# Altium PCB betterfc_v0.1.PcbDoc
Units mm, origin at the board's own origin, x right, y up, seen from the top; angles counter-clockwise.
Board outline 30.17 x 30.17 mm, 4 copper layers (Top Layer, Layer 1, Layer 2, Bottom Layer), stack 0.603 mm thick; 57 components, 53 nets, 226 pads, 81 vias.
Unrouted connection lines stored in the file: 1.
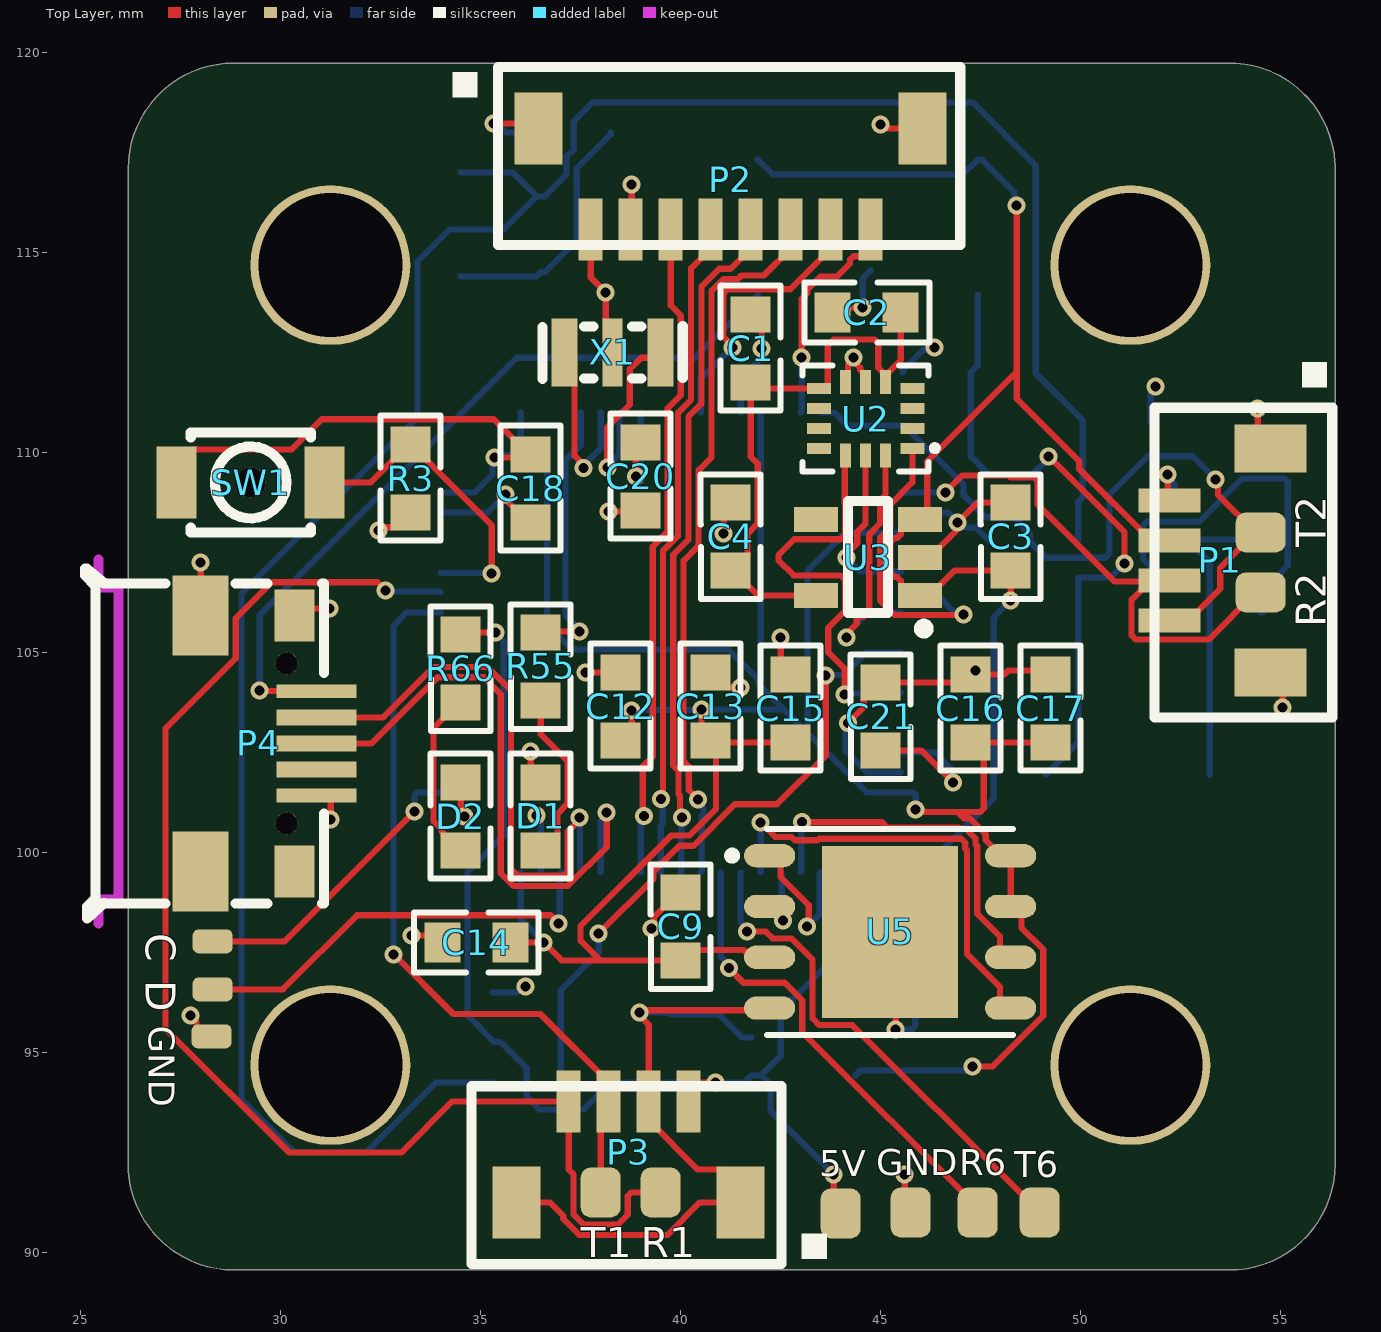
[diagram p0: Top Layer view]
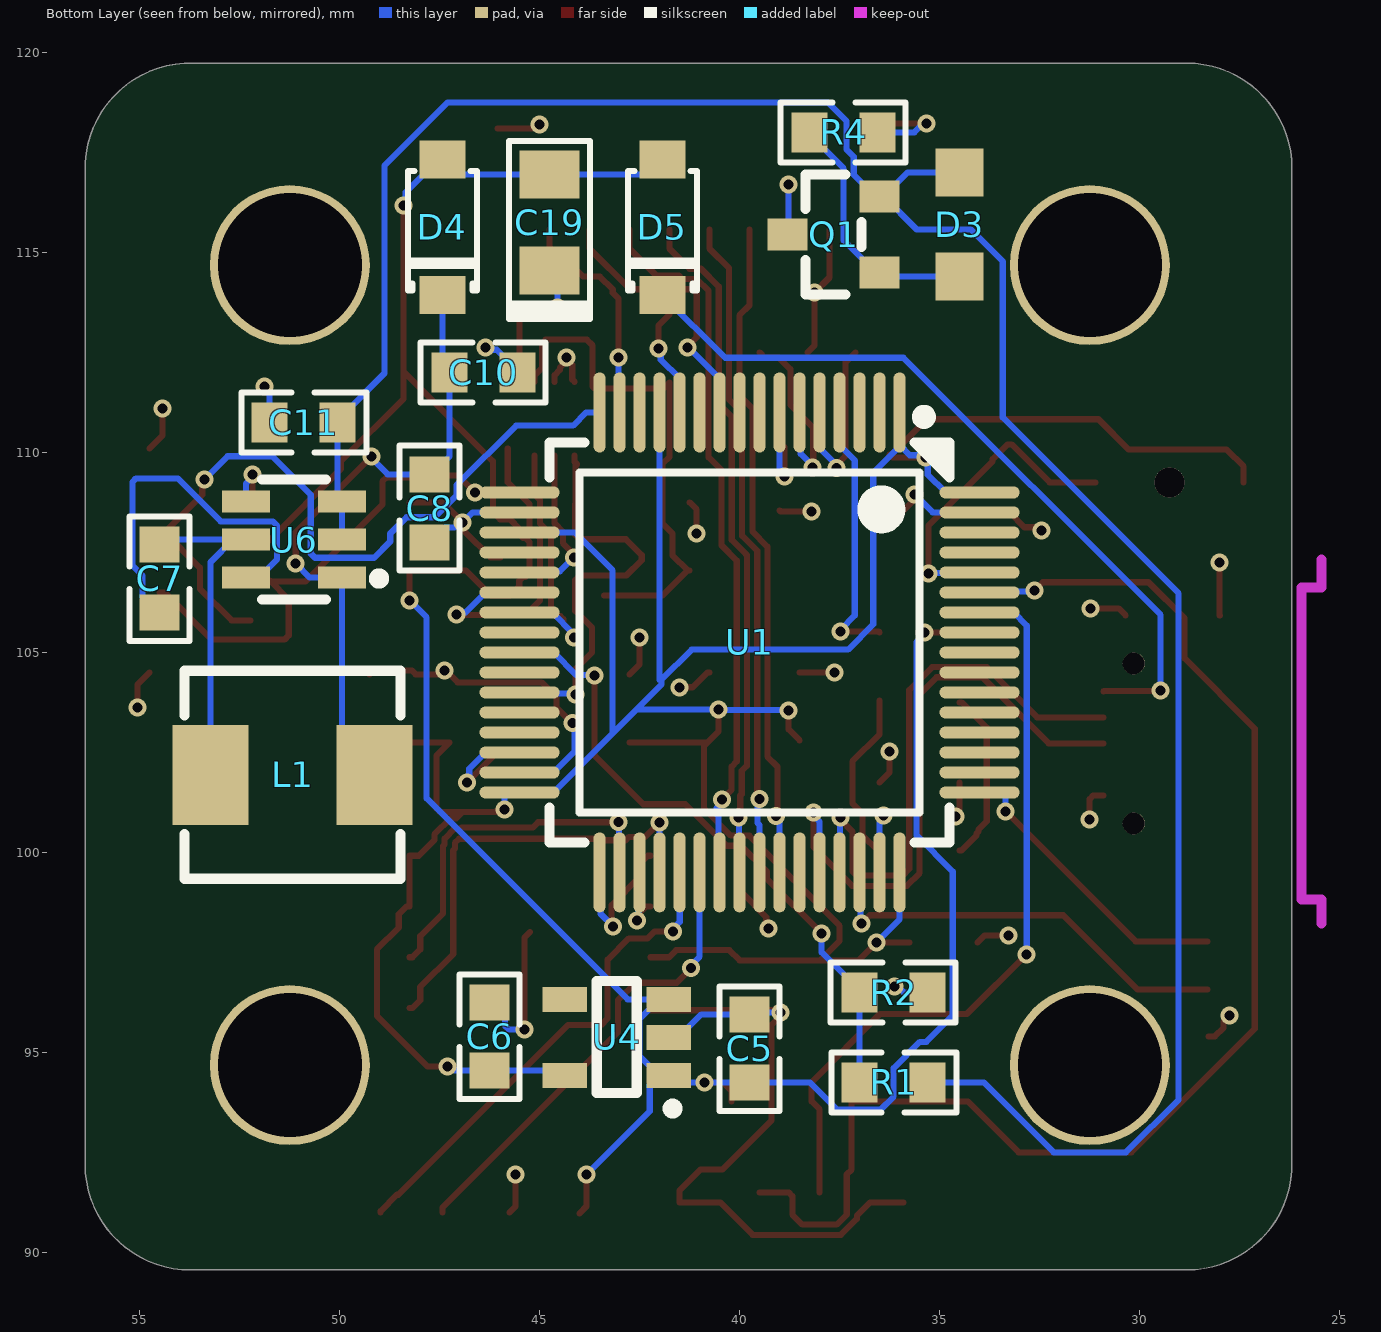
[diagram p1: Bottom Layer view, seen from below]
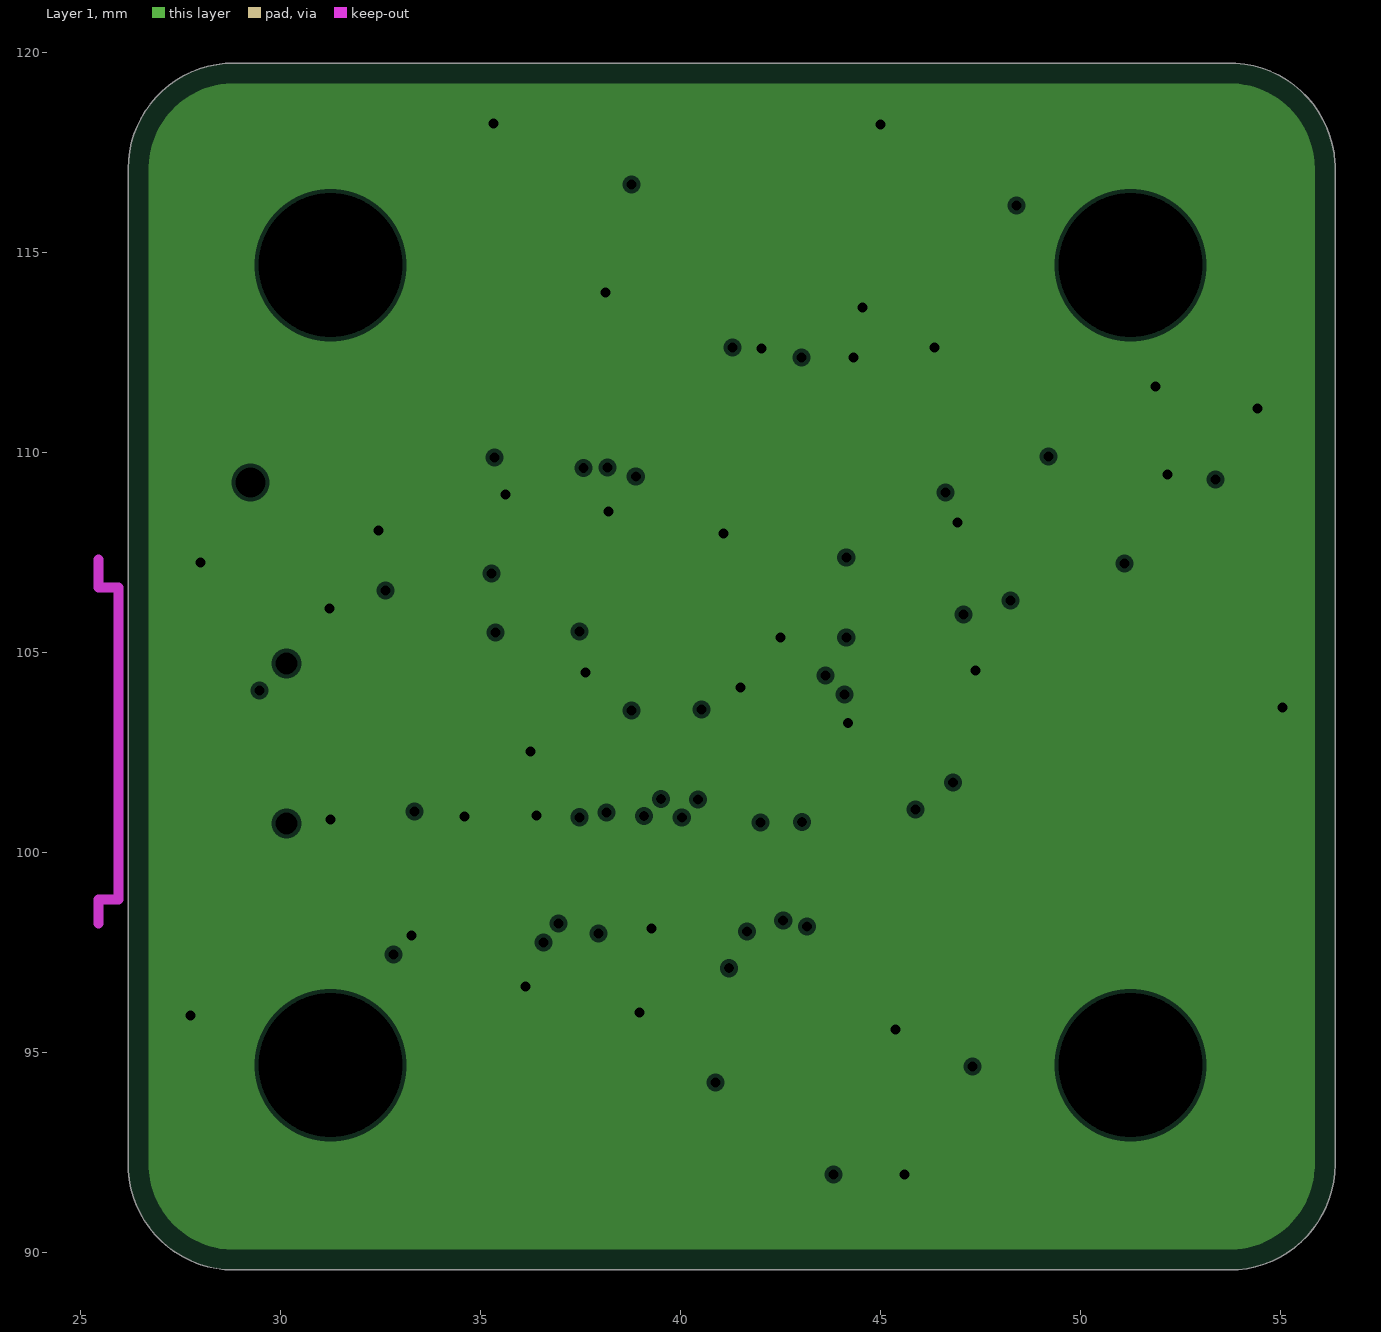
[diagram p2: Layer 1, clearances drawn from the general rule]
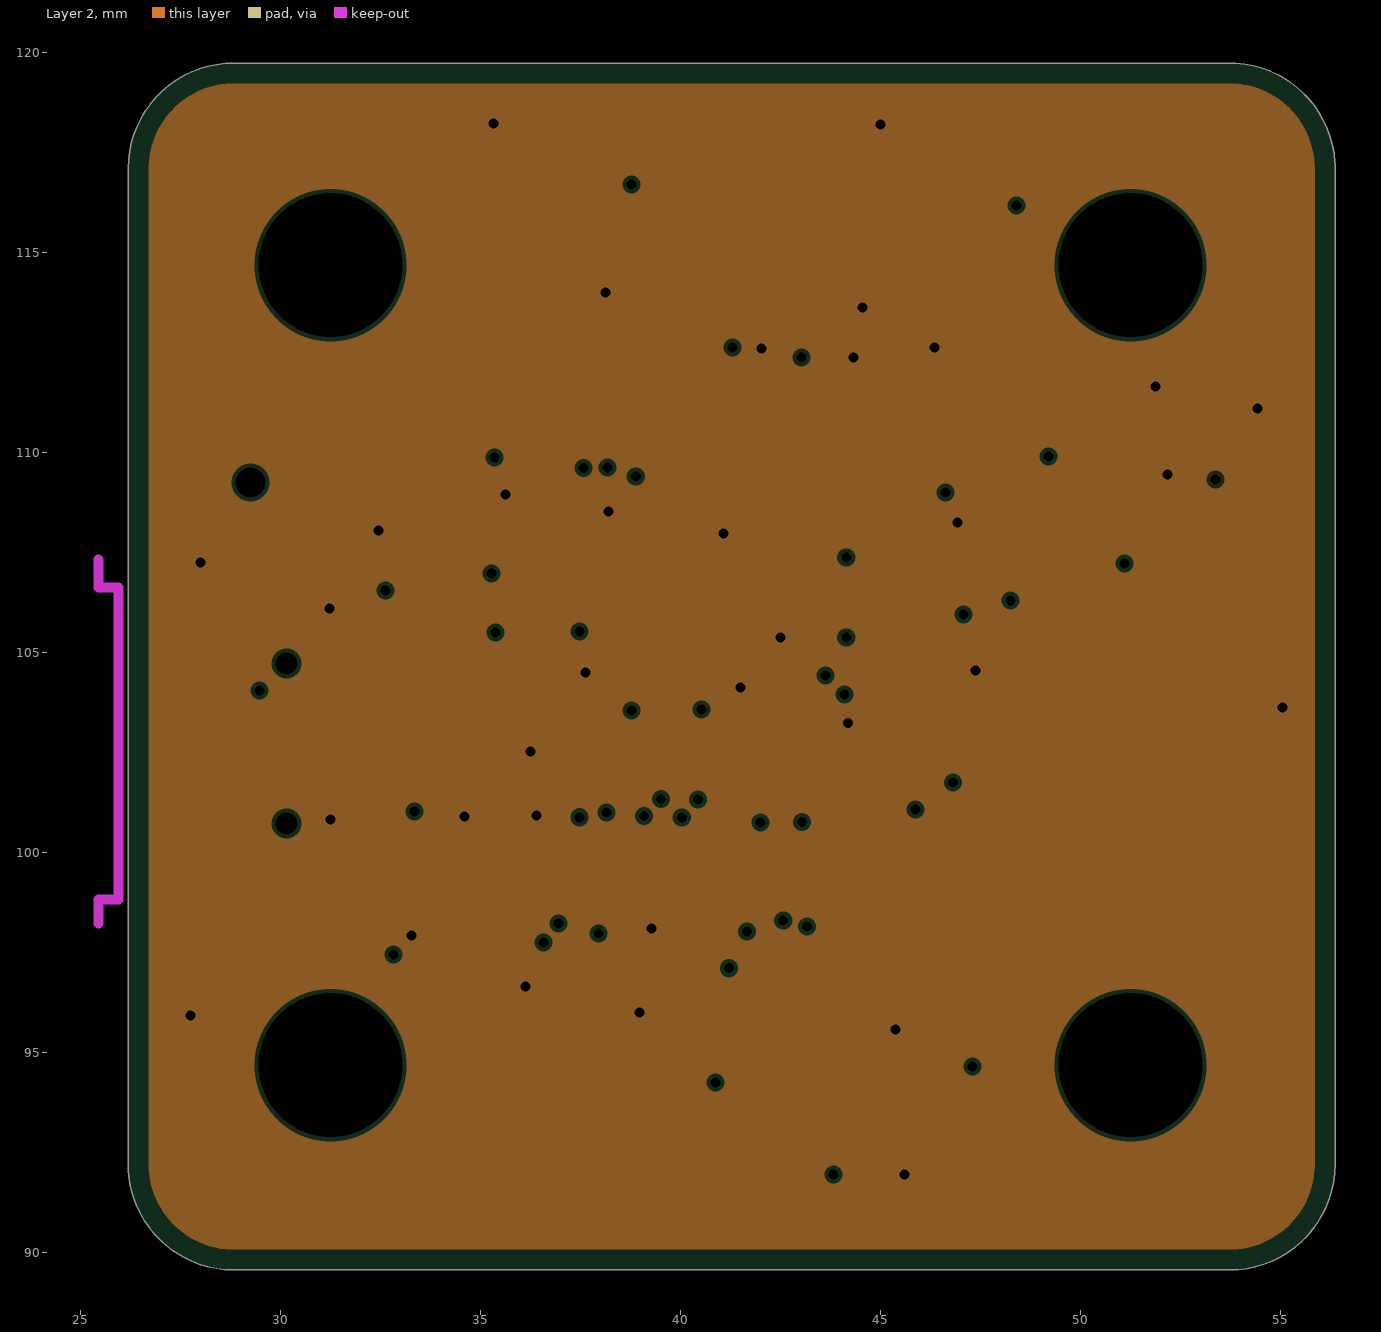
[diagram p3: Layer 2, clearances drawn from the general rule]

## Layer stack, top to bottom
Top Solder: solder mask 0.0102, Solder Resist, Dk 3.5
Top Layer: signal copper 0.0356
Dielectric 2: prepreg 0.0711, PP-006, Dk 4.1
Layer 1: plane copper 0.035, net GND
Dielectric 1: dielectric 0.32, FR-4, Dk 4.8
Layer 2: plane copper 0.035, net GND
Dielectric 3: prepreg 0.0711, PP-006, Dk 4.1
Bottom Layer: signal copper 0.0356
Bottom Solder: solder mask 0.0102, Solder Resist, Dk 3.5

## Board outline
28.829,89.562 cw(c28.829,92.202) 26.193,92.045 26.189,92.075 26.189,117.094 cw(c28.829,117.094) 28.829,119.734 28.83,119.734 53.721,119.734 53.848,119.734 53.878,119.73 cw(c53.721,117.094) 56.357,117.251 56.361,117.221 56.361,92.202 cw(c53.721,92.202) 53.721,89.562

## Design rules (kind name [scope] priority, off if disabled: settings)
BoardOutlineClearance [All] p1: gap=0.2 ignorepadtopadclearanceinfootprint=FALSE
Clearance [All] p1: gap=0.102 ignorepadtopadclearanceinfootprint=FALSE except(0.127: Arc-Via Track-Via SMDPad-Via THPad-Via Via-Via Via-Fill Via-Poly Via-Region Via-Text; 0.25: Arc-Hole Track-Hole SMDPad-Hole THPad-Hole Via-Hole Fill-Hole Poly-Hole Region-Hole Text-Hole)
ComponentClearance [All] p1: gap=0.102 collisioncheckmode=3 verticalgap=0.102 showdistances=TRUE
DiffPairsRouting [All] p1: maxlimit=0.102 minlimit=0.102 mostfreqgap=0.102 toplayer_minwidth=0.102 toplayer_maxwidth=1816.048 toplayer_prefwidth=0.102 bottomlayer_minwidth=0.102 bottomlayer_maxwidth=1816.048 bottomlayer_prefwidth=0.102 maxuncoupledlength=12.7
Height [All] p1: minheight=0 maxheight=1816.048 prefheight=12.7
HoleSize [All] p1: absolutevalues=TRUE maxlimit=6.3 minlimit=0.2 maxpercent=80.000 minpercent=20.000
HoleToHoleClearance [All] p1: gap=0.25 allowstackedmicrovias=FALSE
MinimumAnnularRing [All] p1: minimumring=0.076
MinimumSolderMaskSliver [All] p1: minsoldermaskwidth=0
PlaneClearance [All] p1: clearance=0.102
PlaneConnect PlaneConnectPowerPads [InPadClass('PowerPads')] p1: planeconnectstyle=Direct reliefexpansion=0.508 reliefentries=4 reliefconductorwidth=0.254 reliefairgap=0.254
PlaneConnect [All] p2: pad.planeconnectstyle=Relief pad.reliefexpansion=0.3 pad.reliefentries=4 pad.reliefconductorwidth=0.102 pad.reliefairgap=0.102 via.planeconnectstyle=Direct via.reliefexpansion=0.3 via.reliefentries=4 via.reliefconductorwidth=0.127 via.reliefairgap=0.127
PolygonConnect PolygonConnectPowerPads [All vs (InPadClass('PowerPads'))] p1: connectstyle=Direct reliefconductorwidth=0.254 reliefentries=4 polygonreliefangle="90 Angle" airgapwidth=0.254
PolygonConnect [All] p2: thpad.connectstyle=Relief thpad.reliefconductorwidth=0.102 thpad.reliefentries=4 thpad.polygonreliefangle="90 Angle" thpad.airgapwidth=0.102 smdpad.connectstyle=Relief smdpad.reliefconductorwidth=0.102 smdpad.reliefentries=4 smdpad.polygonreliefangle="90 Angle" smdpad.airgapwidth=0.102 via.connectstyle=Direct via.reliefconductorwidth=0.127 via.reliefentries=4 via.polygonreliefangle="90 Angle" via.airgapwidth=0.127
RoutingVias [All] p1: holewidth=0.2 width=0.45 viastyle="Through Hole" minholewidth=0.2 minwidth=0.45 maxholewidth=6.3 maxwidth=6.55
SilkToSilkClearance [All] p1: silktosilkclearance=0
SilkToSolderMaskClearance [IsPad] p1: minsilkscreentomaskgap=0.102 clearancetoexposedcopper=TRUE
SolderMaskExpansion [All] p1: expansion=0.075 istentingtop=FALSE
Width [All] p1: maxlimit=1816.048 minlimit=0.155 preferedwidth=0.155 minimp=50.000000 maximp=50.000000 favimp=50.000000
20 further rules are at their usual default settings.

## Classes and differential pairs
component class betterfc: 5V C C1 C2 C3 C4 C5 C6 C7 C8 C9 C10 C11 C12 C13 C14 C15 C16 C17 C18 C19 C20 C21 D D1 D2 D3 D4 D5 GND L1 P1 P2 P3 Q1 R1 R2 R3 R4 R6 R55 R66 SW1 T1 T2 T6 U1 U2 U3 U4 U5 U6 X1

## Components (designator, comment, footprint, x,y, rotation, side; value= is the part's Value field where it differs from the comment)
5V "PAD" pad#1 44,90.975 r0 top
C "PAD" pad#2 28.3,97.775 r90 top (schematic designator SWC)
C1 "100nF" 0603 48.798,118.595 r90 top
C2 "100nF" 0603 50.645,106.452 r0 top
C3 "1uF (X7R)" 0603 41.202,101.905 r270 top
C4 "1uF (X7R)" 0603 34.202,101.905 r270 top
C5 "1uF (X7R)" 0603 46.798,89.105 r270 bottom
C6 "1uF (X7R)" 0603 53.298,89.405 r270 bottom
C7 "100nF" 0603 61.548,100.855 r270 bottom
C8 "22uF" 0603 40.702,114.595 r90 bottom
C9 "100nF" 0603 32.952,92.155 r270 top
C10 "22uF" 0603 52.395,119.048 r0 bottom
C11 "10uF" 0603 44.905,103.702 r180 bottom
C12 "100nF" 0603 45.548,109.645 r90 top
C13 "100nF" 0603 47.798,109.645 r90 top
C14 "100nF" 0603 28.905,104.798 r180 top
C15 "100nF" 0603 49.798,109.595 r90 top
C16 "100nF" 0603 54.298,109.595 r90 top
C17 "4.7uF" 0603 56.298,109.595 r90 top
C18 "100nF" 0603 43.298,115.095 r90 top
C19 "100uF" "polorizedC - duplicate" 44.75,115.75 r90 bottom
C20 "1uF" 0603 46.048,115.395 r90 top
C21 "2.2uF" 0603 37.952,97.405 r270 top
D "PAD" pad#2 28.3,96.575 r90 top (schematic designator SWD)
D1 "LED1 (Blue - Status)" 0603 43.548,106.895 r90 top
D2 "LED2 (Red - PWR)" 0603 41.548,106.895 r90 top
D3 "Zenerdiode" Zenerdiode 34.5,117 r90 bottom
D4 "B5819W_C305445" scottydiode 47.5,116 r90 bottom
D5 "B5819W_C305445" scottydiode 42,116 r90 bottom
GND "PAD" pad#1 45.75,91 r180 top (schematic designator GND3)
GND "PAD" pad#2 28.275,95.4 r270 top (schematic designator GND2)
L1 "4.7uH" coil 51,101.5 r180 bottom
P1 "RXplug" RXplug 51.336,94.862 r270 top
P2 "ESCplug" ESCplug 40.767,115.57 r0 top
P3 "VTXplug" VTXplug 33.501,90.346 r180 top
P4 "MicroUSB" microUSB 31.493,106.941 r180 top
Q1 "mosfet" mosfet 37.395,115.474 r180 bottom
R1 "10k" 0603 30.155,87.202 r180 bottom
R1 "PAD" pad#1 39.5,91.5 r180 top
R2 "1k" 0603 42.145,103.548 r0 bottom
R2 "PAD" pad#1 54.5,106.5 r90 top
R3 "10k" 0603 40.298,115.345 r90 top
R4 "100k" 0603 43.395,125.048 r0 bottom
R6 "PAD" pad#1 47.425,91 r180 top
R55 "150" 0603 29.452,98.655 r270 top
R66 "150" 0603 27.452,98.605 r270 top
SW1 "button" button 32.996,109.016 r0 top
T1 "PAD" pad#1 38,91.5 r0 top
T2 "PAD" pad#1 54.5,108 r90 top
T6 "PAD" pad#1 48.975,91 r180 top
U1 "stm32f722" STM32F722RET6 39.35,105.142 r0 bottom
U2 "BMI270" bmi270 44.25,110.75 r0 top
U3 "AP2112K-3.3TRG1" LDO 44.5,107.25 r0 top
U4 "AP2112K-3.3TRG1" LDO 43.25,95.25 r180 bottom
U5 "blackbox" blackbox 45.25,98 r270 top
U6 "AP63205WU-7" AP63205WU-7 51,107.75 r90 bottom
X1 "8Mhz" crystal 38.325,111.015 r0 top

## Footprints (in the part's own frame and the unit in brackets; to place one, negate y for a bottom-side part, rotate by r counter-clockwise, add the part's x,y. Pads: shape width x height; smd on the part's side, far side on the other; paste and mask are expansions set on the pad)
0603 [mm]
  rect 0.9x1 smd paste+0 mask+0.051: 1(-6.845,7.048) 2(-5.145,7.048)
  silkscreen extent -7.54,6.3 -4.43,7.8
AP63205WU-7 [mm]
  rect 0.55x1.2 smd paste+0 mask+0.051: 1(-0.877,-1.061) 2(0.073,-1.061) 3(1.022,-1.061) 4(1.022,1.339) 5(0.073,1.339) 6(-0.877,1.339)
  silkscreen extent -1.43,-2.11 1.57,0.94
blackbox [mm]
  oval 0.581x1.276 smd paste+0 mask+0.051: 1(-1.92,-3.026) 2(-0.65,-3.026) 3(0.62,-3.026) 4(1.89,-3.026) 5(1.89,2.999) 6(0.62,2.999) 7(-0.65,2.999) 8(-1.92,2.999)
  rect 4.3x3.4 smd paste+0 mask+0.051: 9(-0.015,-0.013)
  silkscreen extent -2.59,-4.06 2.56,3.06
bmi270 [mm]
  rect 0.6x0.27 smd paste+0 mask+0.051: 1(1.543,-0.654) 2(1.543,-0.154) 3(1.543,0.346) 4(1.543,0.846) 8(-0.797,0.846) 9(-0.797,0.346) 10(-0.797,-0.154) 11(-0.797,-0.654)
  rect 0.27x0.6 smd paste+0 mask+0.051: 5(0.873,1.016) 6(0.373,1.016) 7(-0.127,1.016) 12(-0.127,-0.824) 13(0.373,-0.824) 14(0.873,-0.824)
  silkscreen extent -1.2,-1.23 2.18,1.42
button [mm]
  rect 1x1.8 smd paste+0 mask+0.051: 1(-5.596,0.234) 2(-1.896,0.234)
  round 0.75 hole 0.75 unplated paste+0: ""(-3.746,0.234)
  silkscreen extent -5.25,-1.02 -2.25,1.48
coil [mm]
  rect 1.9x2.5 smd paste+0 mask+0.051: 1(-2.225,0.441) 2(1.875,0.441)
  silkscreen extent -2.87,-2.16 2.53,3.04
crystal [mm]
  rect 0.65x1.7 smd paste+0 mask+0.051: 1(-1.225,1.485) 3(1.175,1.485)
  rect 0.5x1.7 smd paste+0 mask+0.051: 2(-0.025,1.485)
  silkscreen extent -1.78,0.82 1.73,2.15
ESCplug [mm]
  rect 0.6x1.55 smd: 1(-3.016,0) 2(-2.016,0) 3(-1.016,0) 4(-0.016,0) 5(0.984,0) 6(1.984,0) 7(2.984,0) 8(3.984,0)
  rect 1.2x1.8 smd: 9(-4.316,2.525) 10(5.284,2.525)
  silkscreen extent -6.48,-0.38 6.22,4.06
LDO [mil]
  rect 43.5x24.5 smd paste+0 mask+2: 1(58.25,-32.48) 2(58.25,4.89) 3(58.25,42.3) 4(-44.11,42.3) 5(-44.11,-32.48)
  silkscreen extent -13,-70 67,60
microUSB [mm]
  rect 2x0.34 smd paste+0 mask+0.051: 1(0.592,2.916) 5(0.592,5.516)
  rect 2x0.4 smd paste+0 mask+0.051: 2(0.592,3.566) 3(0.592,4.216) 4(0.592,4.866)
  rect 1x1.3 smd paste+0 mask+0.051: 6(1.143,1.016) 9(1.143,7.416)
  rect 1.4x2 smd paste+0 mask+0.051: 7(3.497,1.016) 8(3.497,7.416)
  round 0.55 hole 0.55 unplated paste+0: ""(1.347,6.216) ""(1.347,2.216)
  Keep-Out Layer lines w0.254: 6.045,8.716 6.045,8.116 5.545,8.116 5.545,8.016 5.545,0.316 6.045,0.316 6.045,-0.384
  silkscreen extent 0.41,-0.15 6.38,8.59
mosfet [mm]
  rect 1x0.8 smd paste+0 mask+0.051: 1(0.895,-0.974) 2(0.895,0.926) 3(-1.405,-0.024)
  silkscreen extent -0.96,-1.52 0.44,1.48
pad#1 [mm]
  rrect50% 1x1.25 smd: 1(0,0)
pad#2 [mm]
  rrect50% 0.6x1 smd: 1(0,0)
"polorizedC - duplicate" [mm]
  rect 1.2x1.5 smd paste+0 mask+0.051: 1(-1.2,0) 2(1.2,0)
  silkscreen extent -2.41,-1.02 2.03,1.02
RXplug [mm]
  rect 0.6x1.55 smd: 1(-13.938,0.889) 2(-12.938,0.889) 3(-11.938,0.889) 4(-10.938,0.889)
  rect 1.2x1.8 smd: 5(-15.238,3.414) 6(-9.638,3.414)
  silkscreen extent -17.4,0.51 -8.51,4.95
scottydiode [mm]
  rect 0.95x1.15 smd paste+0 mask+0.051: 1(-2.065,-0.074) 2(1.32,-0.074)
  silkscreen extent -1.95,-0.94 1.03,0.79
STM32F722RET6 [mm]
  oval 0.3x2 smd paste+0 mask+0.051: 1(-3.35,-5.858) 2(-2.85,-5.858) 3(-2.35,-5.858) 4(-1.85,-5.858) 5(-1.35,-5.858) 6(-0.85,-5.858) 7(-0.35,-5.858) 8(0.15,-5.858) 9(0.65,-5.858) 10(1.15,-5.858) 11(1.65,-5.858) 12(2.15,-5.858) 13(2.65,-5.858) 14(3.15,-5.858) 15(3.65,-5.858) 16(4.15,-5.858) 33(4.15,5.642) 34(3.65,5.642) 35(3.15,5.642) 36(2.65,5.642) 37(2.15,5.642) 38(1.65,5.642) 39(1.15,5.642) 40(0.65,5.642) 41(0.15,5.642) 42(-0.35,5.642) 43(-0.85,5.642) 44(-1.35,5.642) 45(-1.85,5.642) 46(-2.35,5.642) 47(-2.85,5.642) 48(-3.35,5.642)
  oval 2x0.3 smd paste+0 mask+0.051: 17(6.15,-3.858) 18(6.15,-3.358) 19(6.15,-2.858) 20(6.15,-2.358) 21(6.15,-1.858) 22(6.15,-1.358) 23(6.15,-0.858) 24(6.15,-0.358) 25(6.15,0.142) 26(6.15,0.642) 27(6.15,1.142) 28(6.15,1.642) 29(6.15,2.142) 30(6.15,2.642) 31(6.15,3.142) 32(6.15,3.642) 49(-5.35,3.642) 50(-5.35,3.142) 51(-5.35,2.642) 52(-5.35,2.142) 53(-5.35,1.642) 54(-5.35,1.142) 55(-5.35,0.642) 56(-5.35,0.142) 57(-5.35,-0.358) 58(-5.35,-0.858) 59(-5.35,-1.358) 60(-5.35,-1.858) 61(-5.35,-2.358) 62(-5.35,-2.858) 63(-5.35,-3.358) 64(-5.35,-3.858)
  silkscreen extent -4.6,-5.9 5.4,4.89
VTXplug [mm]
  rect 0.6x1.55 smd: 1(-6.699,-3.429) 2(-5.699,-3.429) 3(-4.699,-3.429) 4(-3.699,-3.429)
  rect 1.2x1.8 smd: 5(-7.999,-0.904) 6(-2.399,-0.904)
  silkscreen extent -10.16,-3.81 -1.27,0.63
Zenerdiode [mm]
  rect 1.2x1.2 smd: 1(-2.6,0) 2(0,0)

## Part data
C1 C2 C3 C4 C5 C6 C7 C8 C9 C10 C11 C12 C13 C14 C15 C16 C17 C18 C20 C21: library part C
C19: library part "polorized C"
D1 D2: library part LED
D4 D5: library part ScottyDiode
L1: library part coil
R1 R2 R3 R4 R55 R66: library part R
U3 U4: library part LDO
X1: library part Crystal

## Free pads (board coordinates)
  round 4 hole 3.6: ""(31.242,94.681) ""(31.242,114.681) ""(51.242,94.681) ""(51.242,114.681)

## Via types
v1: diameter 0.45, hole 0.25, Top Layer to Bottom Layer, 81 vias

## Nets (pads, with @x,y where several pads share a name; then routed paths per layer and width w, separated by ;. In a path a pad name is that pad's centre, name@x,y a point inside that pad or via, vN(x,y) a via of type N, cw(c..) or ccw(c..) an arc to the next point about the centre after c; other vN are vias at no path point)
3V3: C6.2 C9.2 C12.1 C13.1 C14.1 C15.1 C16.1 C17.1 C18.2 SW1.1 U1.1 U1.13 U1.19 U1.32 U1.48 U1.64 U4.5 U5.3 U5.7 U5.8 | length 85.1
  Top Layer w0.155: SW1.1 27.4,109.65 27.822,110.072 30.269,110.072 31.026,110.829 35.321,110.829 36.2,109.95 C18.2 36.175,109.875 v1(35.35,109.875) ; C14.1 v1(36.575,97.75) 37.025,97.3 37.985,97.3 ; C12.1 38.775,103.075 v1(38.775,103.55) ; v1(40.523,103.575) 40.523,103.027 C13.1 C13.1@40.8,102.75 ; U5.3 41.761,97.38 41.583,97.558 40.258,97.558 C9.2 37.985,97.3 ; C15.1 C13.1@40.8,102.75 ; v1(45.875,101.075) 45.931,101.019 46.105,101.019 46.113,101.01 46.927,101.01 ; v1(47.3,94.65) 47.801,94.65 49.066,95.915 49.066,97.574 48.519,98.121 48.519,98.453 48.322,98.65 U5.7 U5.8 48.017,99.92 47.629,100.308 47.629,100.451 47.223,100.857 47.08,100.857 46.927,101.01 ; C17.1 C16.1 47.575,102.425 47.575,101.101 47.484,101.01 46.927,101.01 ; 37.985,97.3 37.497,97.788 37.497,98.162 39.758,100.423 40.215,100.423 40.885,101.093 40.885,102.665 C13.1@40.8,102.75
  Bottom Layer w0.155: U1.64 34.85,109 35.294,109.444 35.294,109.819 v1(35.35,109.875) 35.406,109.931 35.742,109.931 U1.1@36,110.189 ; U1.48 36,98.325 v1(36.575,97.75) ; U1.1 U1.1@36,110.189 ; v1(38.775,103.55) 38.787,103.563 40.511,103.563 v1(40.523,103.575) 42.575,103.575 ; 42,104.312 U1.13 ; U4.5 44.495,94.55 C6.2 47.12,94.55 47.22,94.65 v1(47.3,94.65) ; U1.19 44.122,108 43.172,107.051 43.172,102.977 ; v1(45.875,101.075) 45.875,101.433 45.808,101.5 U1.32 44.65,101.5 43.172,102.977 ; U1.1@36,110.189 36,110.15 36.658,109.492 36.658,105.703 37.288,105.073 41.192,105.073 41.953,104.312 41.953,104.197 42.575,103.575 ; 42.575,103.575 43.172,102.977
3V3_IMU: C1.1 C2.2 C4.2 U2.5 U2.8 U3.5 | length 14.6
  Top Layer w0.155: C4.2 C4.2@41.3,107.05 ; U3.5 41.925,106.425 C4.2@41.3,107.05 ; U2.5 U2.5@45.123,111.931 ; C2.2 45.5,112.308 U2.5@45.123,111.931 ; C4.2@41.3,107.05 41.672,107.422 41.672,107.969 41.929,108.226 41.929,109.712 41.75,109.891 C1.1 41.904,111.596 U2.8 43.618,111.596 43.676,111.654 43.676,112.676 43.821,112.821 44.847,112.821 44.937,112.73 44.937,112.117 U2.5@45.123,111.931
4V5: D5.1 P4.1 | length 19.1
  Top Layer w0.155: v1(29.475,104.05) 29.487,104.038 30.889,104.038 P4.1
  Bottom Layer w0.155: v1(29.475,104.05) 29.475,105.939 35.902,112.366 40.357,112.366 D5.1
5V: 5V.1 C3.2 C5.2 C19.2 D4.2 D5.2 P1.2 P3.1 R66.1 U3.1 U3.3 U4.1 U4.3 | length 69.4
  Top Layer w0.155: R66.1 34.55,105.5 v1(35.375,105.5) ; P3.1 40.2,94.028 40.422,94.25 v1(40.875,94.25) ; v1(43.825,91.95) 43.826,91.949 43.826,91.149 5V.1 ; v1(48.25,106.3) C3.2 46.846,107.05 46.221,106.425 45.738,106.425 45.505,106.659 45.505,106.793 45.414,106.884 45.353,106.884 45.248,106.989 45.248,107.759 45.353,107.864 45.414,107.864 45.505,107.955 45.505,108.091 45.738,108.324 U3.3 46.166,108.511 46.166,109.78 48.4,112.014 ; v1(48.4,116.175) 48.4,112.014 ; P1.2 51.75,107.8 49.964,109.586 49.964,109.776 48.4,111.34 48.4,112.014
  Bottom Layer w0.155: v1(35.375,105.5) 35.375,105.462 35.575,105.262 35.575,100.425 34.671,99.521 34.671,95.926 35.332,95.265 35.489,95.265 36.15,94.603 36.15,93.897 36.476,93.571 37.562,93.571 38.241,94.25 C5.2 v1(40.875,94.25) 41.595,94.25 U4.1 U4.1@42.012,94.425 ; U4.3 U4.3@42.012,96.324 ; D5.2 42.296,116.95 C19.2 47.056,116.95 D4.2 47.526,117.32 48.344,116.503 48.344,116.231 v1(48.4,116.175) ; v1(43.825,91.95) 42.245,93.53 42.245,94.191 U4.1@42.012,94.425 ; v1(48.25,106.3) 47.825,105.875 47.825,101.35 42.799,96.324 U4.3@42.012,96.324 ; U4.1@42.012,94.425 42.502,94.915 42.502,95.834 U4.3@42.012,96.324
5V_REG: C8.2 C10.2 D4.1 L1.2 U6.1 | length 16.5
  Top Layer w0.155: v1(49.2,109.9) 51.097,108.003 v1(51.097,107.226)
  Bottom Layer w0.155: D4.1 47.426,112.176 C10.2 47.25,109.9 47.7,109.45 C8.2 48.795,109.45 49.2,109.855 v1(49.2,109.9) ; L1.2 49.939,102.755 U6.1 50.744,106.873 v1(51.097,107.226)
GND: C1.2 C2.1 C3.1 C4.1 C5.1 C6.1 C8.1 C9.1 C10.1 C11.1 C12.2 C13.2 C14.2 C15.2 C16.2 C17.2 C18.1 C19.1 C20.1 C21.1 D1.2 D2.2 GND.1 P1.1 P1.5 P1.6 P2.1 P2.9 P2.10 P3.2 P3.5 P3.6 P4.5 P4.6 P4.7 R2.1@35.3,96.5 R3.1 R4.1 U1.12 U1.18 U1.31 U1.47 U1.63 U2.6 U2.7 U3.2 U4.2 U5.4 U5.9 U6.4 X1.2 | length 74.1
  Top Layer w0.155: v1(27.75,95.92) 27.897,95.773 27.897,95.617 28.114,95.4 GND.1@28.275,95.4 ; P4.7 28,105.929 v1(28,107.25) ; P4.6 30.525,106.1 v1(31.225,106.1) ; P4.5 31.158,101.425 31.25,101.332 v1(31.25,100.825) ; v1(32.45,108.05) 32.53,108.05 32.607,108.128 32.878,108.128 R3.1 ; v1(33.275,97.925) 33.875,97.925 C14.2 ; D2.2 34.5,101.08 34.6,100.98 v1(34.6,100.9) ; v1(35.325,118.225) 36.321,118.225 P2.9 ; v1(35.625,108.95) 35.681,108.894 35.681,108.769 36.2,108.25 C18.1 ; P3.6 36.733,91.25 37.064,90.918 37.064,90.841 37.466,90.439 39.671,90.439 40.482,91.25 P3.5 41.5,91.55 40.977,92.073 40.427,92.073 39.2,93.3 P3.2 39.2,95.695 38.975,95.92 v1(38.975,96) 39.03,96.055 42.232,96.055 42.257,96.079 42.227,96.11 U5.4 ; v1(36.25,102.525) 36.25,102 D1.2 ; v1(37.625,104.5) C12.2 ; P2.1 37.751,114.374 v1(38.125,114) 38.125,113.542 38.128,113.54 38.128,112.673 X1.2 ; v1(38.2,108.525) 38.975,108.525 C20.1 ; v1(39.275,98.1) 39.331,98.156 39.331,98.381 39.95,99 C9.1 ; C13.2 40.8,104.5 41.172,104.128 41.497,104.128 v1(41.5,104.125) ; v1(41.075,107.975) 41.075,108.575 C4.1 ; C1.2 42.025,113.175 v1(42.025,112.6) ; v1(42.5,105.375) 42.5,104.7 C15.2 ; C2.1 43.85,113.45 44.025,113.625 v1(44.55,113.625) ; U2.7 44.181,111.823 44.181,112.192 v1@44.325,112.337 ; v1(44.18,103.235) 44.578,103.632 44.578,103.878 44.95,104.25 C21.1 47.05,104.25 C16.2 C16.2@47.372,104.45 ; v1(44.325,112.368) v1@44.325,112.337 ; U2.6 44.623,111.931 44.491,112.064 44.491,112.123 44.325,112.289 v1@44.325,112.337 ; v1(45,118.2) 45.08,118.2 45.185,118.095 P2.10 ; U5.9 45.375,97.876 v1(45.375,95.575) ; v1(45.6,91.95) 45.6,91.15 GND.1@45.75,91 ; U3.2 46.221,107.374 46.869,108.022 46.869,108.194 v1(46.925,108.25) 47.425,108.75 C3.1 ; v1(47.372,104.55) C16.2@47.372,104.45 ; C17.2 49.15,104.55 48.195,104.55 48.095,104.45 C16.2@47.372,104.45 ; v1(52.175,109.45) 52.175,108.85 P1.1 ; v1(54.425,111.1) 54.425,110.425 P1.5 ; P1.6 55.05,104.2 v1(55.05,103.625)
  Bottom Layer w0.155: U1.63 35.175,108.5 v1(35.625,108.95) ; R2.1@35.3,96.5 35.898,96.5 36.048,96.65 v1(36.125,96.65) ; v1(35.325,118.225) 35.405,118.225 35.63,118 R4.1 ; v1(36.4,100.925) 36.4,100.845 36.5,100.745 U1.47 ; v1(38.975,96) 39.7,96 C5.1 40.953,95.95 41.529,95.374 U4.2 ; U1.12 41.5,111.85 41.969,112.318 41.969,112.544 v1(42.025,112.6) ; v1(44.18,103.235) 44.125,103.18 44.125,102.525 44.65,102 U1.31 ; v1(44.55,113.625) 44.55,114.35 C19.1 ; v1(45.375,95.575) 45.775,95.575 45.865,95.666 45.865,95.878 46.238,96.25 C6.1 ; U1.18 46.675,108.5 v1(46.925,108.25) ; C10.1 45.55,112.05 46.069,112.569 46.294,112.569 v1(46.35,112.625) ; 47.132,108.122 47.378,108.122 C8.1 ; C11.1 51.75,111.445 51.875,111.57 v1(51.875,111.65) ; v1(52.175,109.45) 52.175,109.387 52.339,109.223 U6.4
NetC7_1: C7.1 L1.1 U6.5 | length 8.3
  Bottom Layer w0.155: U6.5 U6.5@52.664,107.823 ; L1.1 53.225,107.261 U6.5@52.664,107.823 ; C7.1 54.377,107.823 U6.5@52.664,107.823
NetC7_2: C7.2 U6.6 | length 9.5
  Bottom Layer w0.155: U6.6 52.014,106.873 51.56,107.327 51.56,108.172 51.665,108.277 52.69,108.277 52.971,108.277 54.044,109.35 55.088,109.35 55.179,109.259 55.179,107.176 54.922,106.919 54.922,106.372 54.55,106 C7.2
NetC20_2: C20.2 U1.7 | length 2.6
  Top Layer w0.155: v1(38.878,109.4) 38.878,110.128 C20.2
  Bottom Layer w0.155: v1(38.878,109.4) 38.878,109.48 39,109.602 U1.7
NetC21_2: C21.2 U1.30 | length 3.9
  Top Layer w0.155: C21.2 46.011,102.55 v1(46.811,101.75)
  Bottom Layer w0.155: U1.30 46.35,102.5 46.755,102.095 46.755,101.806 v1(46.811,101.75)
NetD1_1: D1.1 R55.2 | length 4.3
  Top Layer w0.155: D1.1 36.55,100.05 36.922,100.422 36.922,100.969 37.179,101.226 37.179,102.274 36.5,102.953 R55.2
NetD2_1: D2.1 R66.2 | length 4.3
  Top Layer w0.155: D2.1 34.45,100.05 34.078,100.422 34.078,100.473 34.025,100.525 34.025,100.575 33.821,100.779 33.821,103.121 34.45,103.75 R66.2
NetD3_1: D3.1 Q1.1 R4.2 | length 6.3
  Bottom Layer w0.155: D3.1 36.4,114.4 Q1.1 36.6,114.5 37.4,115.3 37.4,117.1 38.25,117.95 R4.2
NetP1_3: P1.3 R2.1@54.5,106.5 U1.17 | length 13.7
  Top Layer w0.155: v1(46.618,109) 47.043,109.425 48.2,109.425 48.246,109.379 48.824,109.379 48.929,109.274 48.929,108.696 50.852,106.773 51.723,106.773 P1.3@51.75,106.8 ; P1.3 P1.3@51.75,106.8 ; R2.1@54.5,106.5 54.375,106.5 53.196,105.321 51.376,105.321 51.271,105.426 51.271,106.321 P1.3@51.75,106.8
  Bottom Layer w0.155: U1.17 v1@46.618,109
NetP1_4: P1.4 T2.1 U1.16 | length 19
  Top Layer w0.155: P1.4 52.7,105.8 53.491,106.591 53.491,107.116 T2.1@54.375,108 ; v1(53.375,109.325) 53.431,109.269 53.431,108.944 T2.1@54.375,108 ; T2.1 T2.1@54.375,108
  Bottom Layer w0.155: U1.16 43.835,111 44.163,110.672 45.586,110.672 47.071,109.188 47.071,108.926 47.618,108.379 48.324,108.379 48.73,107.974 48.73,107.774 49.135,107.368 50.613,107.368 50.718,107.473 50.718,108.423 50.718,108.943 51.678,109.903 52.798,109.903 v1(53.375,109.325)
NetP2_3: P2.3 U1.42 | length 16.6
  Top Layer w0.155: v1(39.086,100.911) 39.052,100.944 39.052,102.149 39.301,102.398 39.301,107.648 39.679,108.026 39.679,111.104 40.004,111.429 40.004,113.424 39.751,113.677 P2.3
  Bottom Layer w0.155: U1.42 39,100.745 39.086,100.831 v1(39.086,100.911)
NetP2_4: P2.4 U1.41 | length 16.6
  Top Layer w0.155: v1(39.505,101.34) 39.558,101.393 39.558,107.542 39.936,107.92 39.936,110.997 40.261,111.322 40.261,114.605 40.751,115.095 P2.4
  Bottom Layer w0.155: U1.41 39.5,100.685 39.553,100.738 39.553,101.292 v1(39.505,101.34)
NetP2_5: P2.5 U1.40 | length 17.1
  Top Layer w0.155: v1(40.028,100.875) 39.98,100.923 39.98,101.42 39.943,101.457 39.943,102.04 39.814,102.17 39.814,107.435 39.843,107.464 40.192,107.813 40.192,110.891 40.517,111.216 40.517,114.146 40.963,114.592 41.248,114.592 41.751,115.095 P2.5
  Bottom Layer w0.155: U1.40 40.014,99.514 40.014,100.862 v1(40.028,100.875)
NetP2_6: P2.6 U1.39 | length 18
  Top Layer w0.155: v1(40.433,101.325) 40.433,101.331 40.2,101.563 40.2,102.147 40.071,102.276 40.071,107.296 40.449,107.674 40.449,109.556 40.774,109.881 40.774,114.04 41.07,114.336 41.432,114.336 41.52,114.423 42.079,114.423 42.751,115.095 P2.6
  Bottom Layer w0.155: v1(40.433,101.325) 40.433,101.245 40.57,101.108 40.57,100.958 40.528,100.916 40.528,99.528 U1.39
NetP2_7: P2.7 U1.10 | length 7
  Top Layer w0.155: v1(41.3,112.625) 41.3,112.65 41.071,112.879 41.071,113.974 41.176,114.079 42.735,114.079 43.751,115.095 P2.7
  Bottom Layer w0.155: U1.10 40.5,111.837 41.288,112.625 v1(41.3,112.625)
NetP2_8: P2.8 U1.15 | length 5.7
  Top Layer w0.155: v1(43.025,112.375) 43.025,113.844 43.171,113.99 43.171,114.074 43.494,114.397 43.907,114.397 44.23,114.721 44.23,114.816 44.321,114.906 44.529,114.906 44.751,115.129 P2.8
  Bottom Layer w0.155: U1.15 43.025,111.025 v1(43.025,112.375)
NetP3_3: P3.3 T1.1 U1.58 | length 19.1
  Top Layer w0.155: v1(32.825,97.45) 34.314,95.961 36.489,95.961 38.2,94.25 P3.3 38,93.575 T1.1
  Bottom Layer w0.155: v1(32.825,97.45) 32.821,97.454 32.821,105.671 33.15,106 U1.58
NetP3_4: P3.4 R1.1@39.5,91.5 U1.59 | length 34.2
  Top Layer w0.155: v1(32.625,106.55) 32.421,106.754 29.776,106.754 28.875,105.853 28.875,104.851 27.117,103.093 27.117,95.593 30.208,92.502 33.022,92.502 34.295,93.775 P3.4 37.2,92.073 37.321,91.952 37.321,90.947 37.572,90.696 38.428,90.696 38.679,90.947 38.679,91.409 38.77,91.5 R1.1@39.5,91.5
  Bottom Layer w0.155: v1(32.625,106.55) 32.65,106.525 33.975,106.525 U1.59
NetP4_2: P4.2 U1.45 | length 14.5
  Top Layer w0.155: P4.2 32.559,103.375 33.82,104.636 35.18,104.636 35.757,104.06 35.757,99.59 35.926,99.421 37.074,99.421 37.179,99.526 37.179,100.524 37.472,100.816 v1(37.472,100.878)
  Bottom Layer w0.155: v1(37.472,100.878) 37.486,100.864 37.486,99.514 U1.45
NetP4_3: P4.3 U1.44 | length 15.5
  Top Layer w0.155: P4.3 32.272,102.725 33.926,104.379 35.074,104.379 35.5,103.953 35.5,99.484 35.82,99.164 37.18,99.164 38.15,100.134 v1(38.15,101)
  Bottom Layer w0.155: U1.44 38,100.77 38.15,100.92 v1(38.15,101)
NetR1_1: R1.1@37,94.25 R2.2 U1.25 | length 15.9
  Top Layer w0.155: v1(37.95,97.975) 39.321,99.346 39.321,99.524 39.963,100.166 40.321,100.166 41.357,101.203 42.406,101.203 43.625,102.422 v1(43.625,104.423)
  Bottom Layer w0.155: R1.1@37,94.25 R2.2 37,96.55 37.95,97.5 v1(37.95,97.975) ; v1(43.625,104.423) 43.635,104.433 44.083,104.433 44.65,105 U1.25
NetR3_2: R3.2 SW1.2 U1.60 | length 7.9
  Top Layer w0.155: SW1.2 32.25,109.25 33.2,110.2 R3.2 33.3,110.2 33.672,109.828 33.672,109.777 35.275,108.175 v1(35.275,106.975)
  Bottom Layer w0.155: U1.60 34.012,106.987 35.263,106.987 v1(35.275,106.975)
NetR6_1: R6.1 U1.38 | length 11.8
  Top Layer w0.155: v1(41.21,97.105) 41.57,96.745 42.6,96.745 43.041,96.304 43.041,95.509 47.425,91.125 R6.1
  Bottom Layer w0.155: U1.38 41,97.395 41.21,97.185 v1(41.21,97.105)
NetR55_1: R55.1 U1.4 | length 6.8
  Top Layer w0.155: R55.1 36.525,105.525 v1(37.475,105.525)
  Bottom Layer w0.155: v1(37.475,105.525) 37.475,105.567 37.118,105.924 37.118,109.802 37.5,110.185 U1.4
NetSWC_1: C.1 U1.49 | length 7.5
  Top Layer w0.155: C.1 30.096,97.775 v1(33.348,101.027)
  Bottom Layer w0.155: v1(33.348,101.027) 33.348,101.433 33.415,101.5 U1.49
NetSWD_1: D.1 U1.46 | length 10.8
  Top Layer w0.155: D.1 30.054,96.575 31.908,98.429 36.746,98.429 v1(36.95,98.225)
  Bottom Layer w0.155: v1(36.95,98.225) 36.975,98.25 36.975,99.475 U1.46
NetT6_1: T6.1 U1.37 | length 12.6
  Top Layer w0.155: v1(41.659,98.021) 42.126,98.021 42.298,97.849 42.766,97.849 43.297,97.318 43.297,95.851 43.462,95.686 44.289,95.686 48.534,91.441 48.566,91.441 48.975,91.032 T6.1
  Bottom Layer w0.155: U1.37 41.497,99.497 41.497,98.263 41.659,98.1 v1(41.659,98.021)
NetU1_5: U1.5 X1.1 | length 4.6
  Top Layer w0.155: X1.1 37.348,112.253 37.348,109.917 37.57,109.695 v1(37.57,109.615)
  Bottom Layer w0.155: v1(37.57,109.615) 37.57,109.681 38,110.111 U1.5
NetU1_6: U1.6 X1.3 | length 5.2
  Top Layer w0.155: v1(38.17,109.622) 38.157,109.635 38.157,110.62 38.729,111.192 38.729,112.083 39.016,112.369 39.369,112.369 X1.3
  Bottom Layer w0.155: v1(38.17,109.622) 38.17,109.662 38.472,109.964 38.472,110.972 U1.6
NetU1_8: U1.8
NetU1_14: U1.14
NetU1_20: U1.20
NetU1_21: U1.21 U2.13 | length 4.3
  Top Layer w0.155: v1(44.139,107.378) 44.139,107.457 44.415,107.733 44.415,108.015 44.623,108.223 U2.13
  Bottom Layer w0.155: v1(44.139,107.378) 44.489,107.028 45.472,107.028 U1.21
NetU1_22: U1.22 U2.1 | length 8.2
  Top Layer w0.155: U2.1 45.793,109.255 45.248,108.71 45.248,108.122 44.991,107.866 44.991,106.296 45.353,105.935 47.06,105.935 v1(47.075,105.95)
  Bottom Layer w0.155: U1.22 46.35,106.5 46.843,106.006 47.019,106.006 v1(47.075,105.95)
NetU1_23: U1.23 U2.14 | length 6.7
  Top Layer w0.155: v1(44.139,105.378) 44.139,105.457 44.401,105.719 44.401,105.829 44.479,105.907 44.588,105.907 44.712,106.03 44.712,107.949 44.991,108.229 44.991,108.816 45.123,108.948 U2.14
  Bottom Layer w0.155: v1(44.139,105.378) 44.139,105.455 44.685,106 U1.23
NetU1_24: U1.24
NetU1_27: U1.27 U2.12 | length 10.6
  Top Layer w0.155: U2.12@44.065,109.703 U2.12@44.1,109.738 ; v1(44.1,103.95) 44.1,104.588 43.687,105.001 43.687,105.615 44.111,106.04 44.111,106.81 43.996,106.925 42.826,106.925 42.444,107.306 42.444,107.435 42.839,107.83 44.002,107.83 44.111,107.939 44.111,108.71 44.1,108.721 U2.12@44.1,109.738 ; U2.12 44.123,109.761 U2.12@44.1,109.738
  Bottom Layer w0.155: v1(44.1,103.95) 44.125,103.975 45.475,103.975 U1.27
NetU1_28: U1.28
NetU1_29: U1.29
NetU1_33: U1.33 U5.1 | length 3.7
  Top Layer w0.155: U5.1 42.297,99.92 42.494,99.723 42.494,99.391 43.199,98.686 43.199,98.188 v1(43.162,98.151)
  Bottom Layer w0.155: v1(43.162,98.151) 43.472,98.461 43.472,99.472 U1.33
NetU1_34: U1.34 U5.6 | length 9.2
  Top Layer w0.155: v1(43.03,100.757) 45.035,100.757 45.169,100.622 46.952,100.622 46.974,100.6 47.117,100.6 47.372,100.345 47.372,100.202 47.416,100.158 47.416,98.472 47.98,97.908 47.98,97.576 48.176,97.38 U5.6
  Bottom Layer w0.155: U1.34 43.015,99.515 43.015,100.742 v1(43.03,100.757)
NetU1_35: U1.35 U5.2 | length 1.8
  Top Layer w0.155: U5.2 42.332,98.65 42.528,98.453 42.528,98.337 v1(42.563,98.302)
  Bottom Layer w0.155: U1.35 42.528,99.472 42.528,98.337 v1(42.563,98.302)
NetU1_36: U1.36 U5.5 | length 11.3
  Top Layer w0.155: v1(42,100.75) 42.361,100.389 42.766,100.389 42.851,100.304 43.423,100.304 43.462,100.344 47.011,100.344 47.116,100.239 47.116,100.095 47.159,100.052 47.159,97.459 47.98,96.638 47.98,96.306 48.176,96.11 U5.5
  Bottom Layer w0.155: U1.36 v1(42,100.75)
NetU1_50: U1.50
NetU1_53: U1.53
NetU1_54: U1.54
VBATT: P2.2 Q1.3 | length 2.4
  Top Layer w0.155: P2.2 38.775,115.594 v1(38.775,116.7)
  Bottom Layer w0.155: v1(38.775,116.7) 38.775,115.475 Q1.3
VIN: C11.2 D3.2 Q1.2 R1.2 U6.2 U6.3 | length 60.8
  Bottom Layer w0.155: D3.2 35.8,117 Q1.2@36.4,116.4 ; R1.2 33.893,94.25 32.145,92.502 30.339,92.502 29.022,93.819 29.022,106.477 33.421,110.875 33.421,114.774 34.223,115.576 35.576,115.576 Q1.2@36.4,116.4 ; U6.2 U6.3 50.05,108.884 C11.2 50.05,110.8 48.877,111.973 48.877,117.173 47.3,118.75 37.797,118.75 37.324,118.277 37.324,117.571 37.143,117.39 37.143,116.944 36.6,116.4 Q1.2 Q1.2@36.4,116.4
pads on no net: P4. P4.4 P4.8 P4.9 SW1. U1.2 U1.3 U1.9 U1.11 U1.26 U1.43 U1.51 U1.52 U1.55 U1.56 U1.57 U1.61 U1.62 U2.2 U2.3 U2.4 U2.9 U2.10 U2.11 U3.4 U4.4

## Polygon pours and split planes (outlines as drawn)
GND on Layer 1 (split plane): 28.827,119.224 28.828,119.224 28.829,119.224 28.83,119.224 53.721,119.224 53.824,119.224 53.839,119.223 53.848,119.222 53.848,119.22 53.907,119.218 54.091,119.193 54.273,119.153 54.45,119.097 54.622,119.026 54.787,118.94 54.944,118.84 55.091,118.727 55.228,118.601 55.354,118.464 55.467,118.317 55.567,118.16 55.653,117.995 55.724,117.823 55.78,117.646 55.82,117.464 55.845,117.28 55.847,117.221 55.849,117.221 55.85,117.212 55.851,117.197 55.851,92.202 55.852,92.188 55.845,92.016 55.82,91.832 55.78,91.65 55.724,91.473 55.653,91.301 55.567,91.136 55.467,90.979 55.354,90.832 55.228,90.695 55.091,90.569 54.944,90.456 54.787,90.356 54.622,90.27 54.45,90.199 54.273,90.143 54.091,90.103 53.907,90.078 53.735,90.071 53.721,90.072 28.829,90.072 28.815,90.071 28.643,90.078 28.459,90.103 28.277,90.143 28.1,90.199 27.928,90.27 27.763,90.356 27.606,90.456 27.459,90.569 27.322,90.695 27.196,90.832 27.083,90.979 26.983,91.136 26.897,91.301 26.826,91.473 26.77,91.65 26.73,91.832 26.705,92.016 26.703,92.075 26.701,92.075 26.7,92.084 26.699,92.099 26.699,117.094 26.698,117.108 26.705,117.28 26.73,117.464 26.77,117.646 26.826,117.823 26.897,117.995 26.983,118.16 27.083,118.317 27.196,118.464 27.322,118.601 27.459,118.727 27.606,118.84 27.763,118.94 27.928,119.026 28.1,119.097 28.277,119.153 28.459,119.193 28.643,119.218 28.814,119.225
GND on Layer 2 (split plane): 28.827,119.224 28.828,119.224 28.829,119.224 28.83,119.224 53.721,119.224 53.824,119.224 53.839,119.223 53.848,119.222 53.848,119.22 53.907,119.218 54.091,119.193 54.273,119.153 54.45,119.097 54.622,119.026 54.787,118.94 54.944,118.84 55.091,118.727 55.228,118.601 55.354,118.464 55.467,118.317 55.567,118.16 55.653,117.995 55.724,117.823 55.78,117.646 55.82,117.464 55.845,117.28 55.847,117.221 55.849,117.221 55.85,117.212 55.851,117.197 55.851,92.202 55.852,92.188 55.845,92.016 55.82,91.832 55.78,91.65 55.724,91.473 55.653,91.301 55.567,91.136 55.467,90.979 55.354,90.832 55.228,90.695 55.091,90.569 54.944,90.456 54.787,90.356 54.622,90.27 54.45,90.199 54.273,90.143 54.091,90.103 53.907,90.078 53.735,90.071 53.721,90.072 28.829,90.072 28.815,90.071 28.643,90.078 28.459,90.103 28.277,90.143 28.1,90.199 27.928,90.27 27.763,90.356 27.606,90.456 27.459,90.569 27.322,90.695 27.196,90.832 27.083,90.979 26.983,91.136 26.897,91.301 26.826,91.473 26.77,91.65 26.73,91.832 26.705,92.016 26.703,92.075 26.701,92.075 26.7,92.084 26.699,92.099 26.699,117.094 26.698,117.108 26.705,117.28 26.73,117.464 26.77,117.646 26.826,117.823 26.897,117.995 26.983,118.16 27.083,118.317 27.196,118.464 27.322,118.601 27.459,118.727 27.606,118.84 27.763,118.94 27.928,119.026 28.1,119.097 28.277,119.153 28.459,119.193 28.643,119.218 28.814,119.225

## Silkscreen, mask and mechanical layers (free items; w line width, h text height)
Board_outline:
  lines w0.2: 26.289,91.825 26.289,116.844 ; 26.289,92.202 ccw(c28.829,92.202) 28.829,89.662 53.721,89.662 ccw(c53.721,92.202) 56.261,92.202 56.261,117.221 ; 26.289,117.094 cw(c28.829,117.094) 28.829,119.634 53.848,119.634 ; 53.721,119.634 cw(c53.721,117.094) 56.261,117.094